# Altium PCB tscnew-tr-3-8(v1).PcbDoc
Units mm, origin at the board's own origin, x right, y up, seen from the top; angles counter-clockwise.
Board outline 151 x 86.38 mm, 2 copper layers (Top Layer, Bottom Layer); 75 components, 62 nets, 232 pads, 0 vias.
Unrouted connection lines stored in the file: 39.
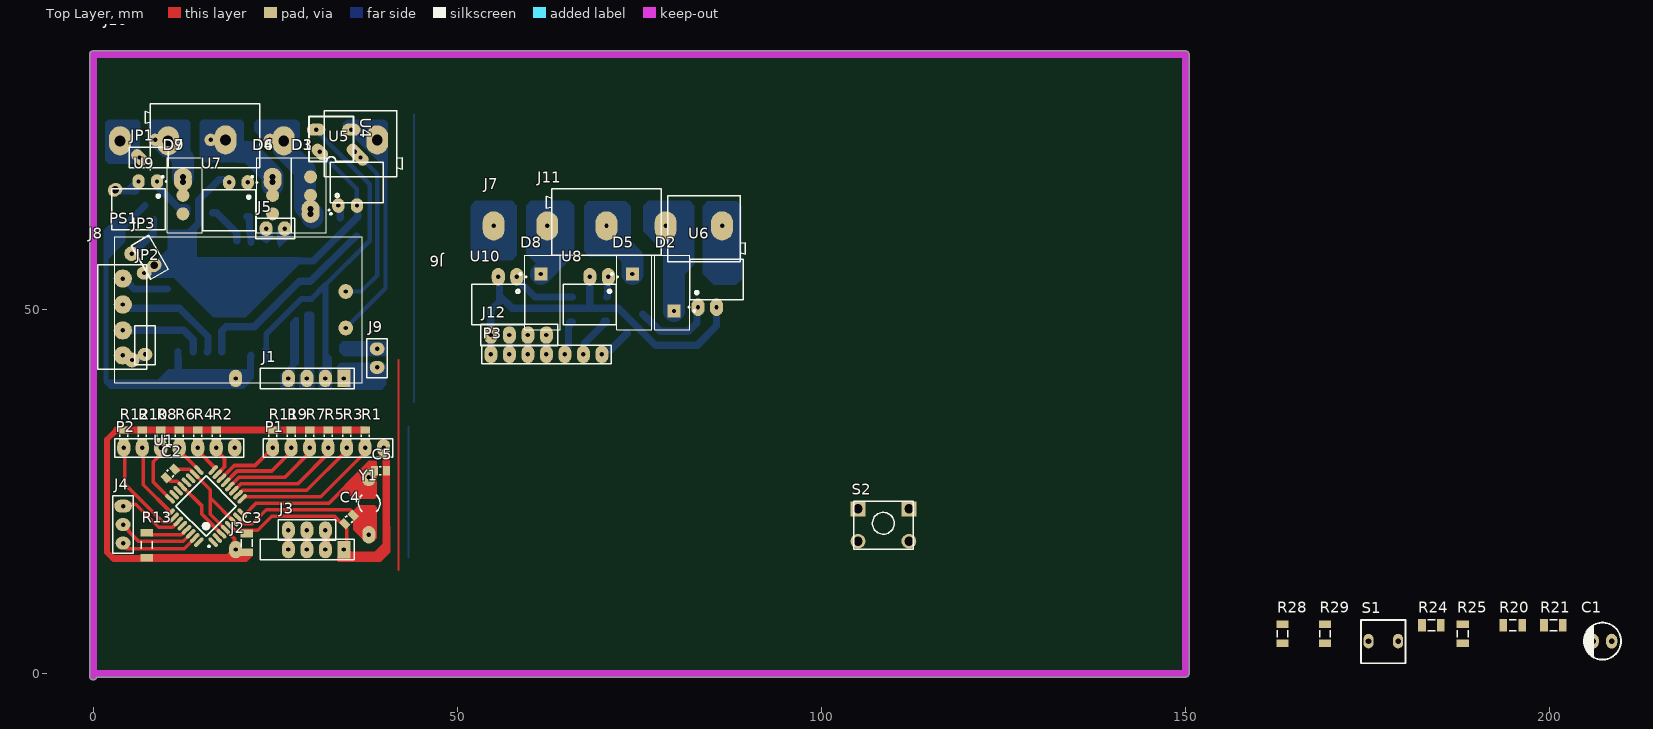
[diagram p0: Top Layer view]
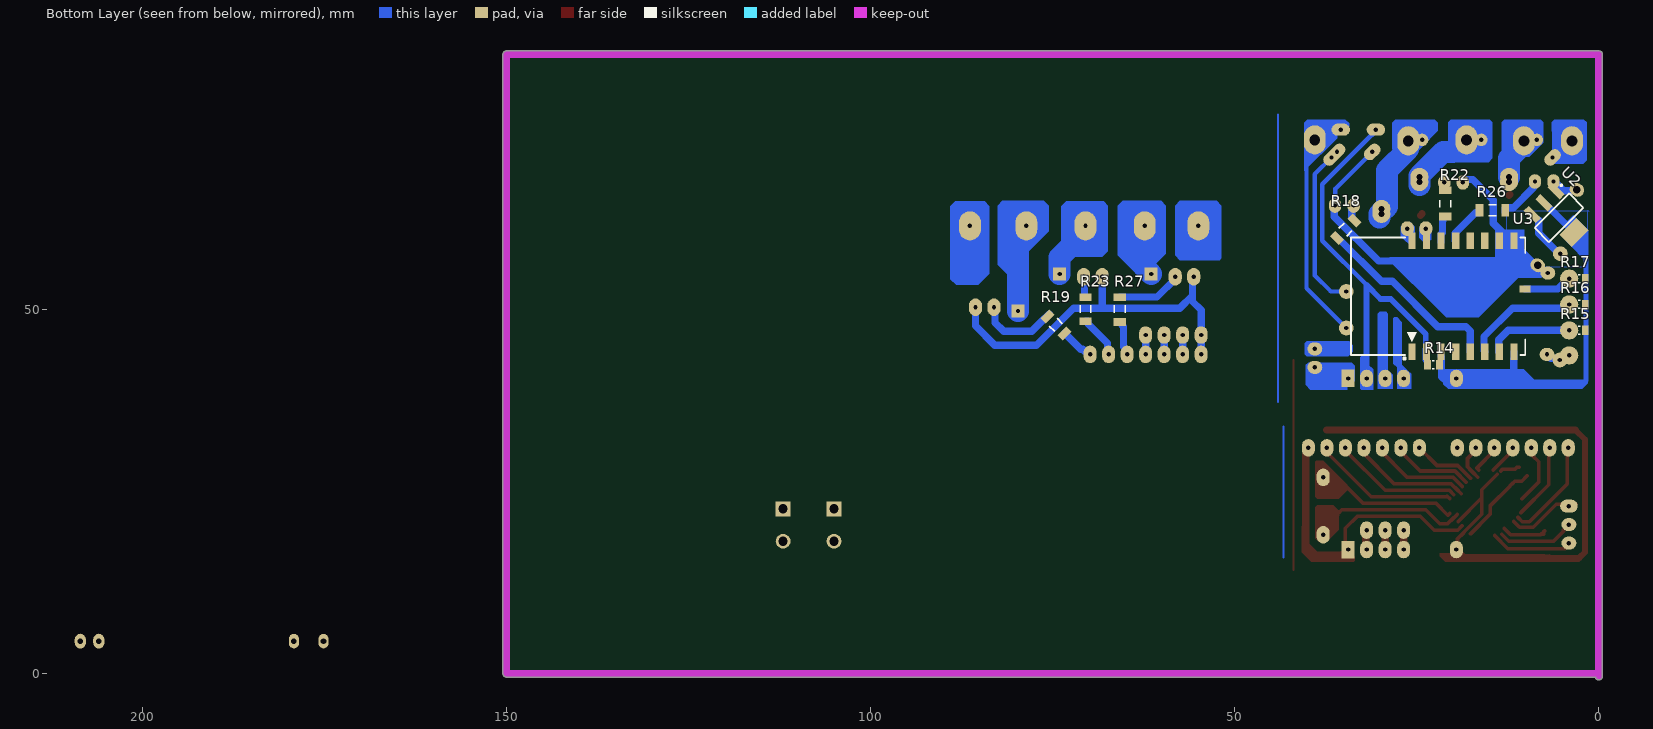
[diagram p1: Bottom Layer view, seen from below]

## Layer stack, top to bottom
Top Solder: solder mask 0.0102, Solder Resist, Dk 3.5
Top Layer: signal copper 0.0356
Dielectric 1: dielectric 0.32, FR-4, Dk 4.8
Bottom Layer: signal copper 0.0356
Bottom Solder: solder mask 0.0102, Solder Resist, Dk 3.5

## Board outline
-0.5,-0.381 -0.5,85 cw(c0,85) 0,85.5 150,85.5 cw(c150,85) 150.5,85 150.5,0 cw(c150,0) 150,-0.5 0.486,-0.5 cw(c0,-0.381)

## Design rules (kind name [scope] priority, off if disabled: settings)
Clearance Clearance_1 [InPolygon] p1: gap=0.8 ignorepadtopadclearanceinfootprint=FALSE
Clearance [All] p2: gap=0.254 ignorepadtopadclearanceinfootprint=FALSE except(0: Arc-Hole Track-Hole SMDPad-Hole THPad-Hole Via-Hole Fill-Hole Poly-Hole Region-Hole Text-Hole)
PolygonConnect [All] p1: connectstyle=Relief reliefconductorwidth=0.254 reliefentries=4 polygonreliefangle="90 Angle" airgapwidth=0.254
RoomDefinition tscnew-tr-3-8 [InComponentClass('tscnew-tr-3-8')] p1: confinementstyle=ConfineIn formatcopy=TRUE lockcomponents=FALSE outline 144.907,-4.953 247.904,-4.953 247.904,23.114 144.907,23.114
RoutingLayers [All] p1: top layer_v5=FALSE bottom layer_v5=TRUE
RoutingVias [All] p1: holewidth=0.711 width=2.5 viastyle="Through Hole" minholewidth=0.711 minwidth=1.27 maxholewidth=0.711 maxwidth=2
SolderMaskExpansion [All] p1: expansion=0.102 istentingtop=FALSE
Width [All] p1: maxlimit=3 minlimit=0.5 preferedwidth=1
29 further rules are at their usual default settings.

## Classes and differential pairs
component class tscnew-tr-3-8: D1 D3 D4 D6 D7 D9 D10 D13 D14 D20 D21 D22 D23 J1 J5 J6 J8 J9 J10 JP1 JP2 JP3 JP? P5 P7 PS1 R14 R15 R16 R17 R18 R22 R26 U2 U3 U4 U5 U7 U9 U17

## Components (designator, comment, footprint, x,y, rotation, side; value= is the part's Value field where it differs from the comment)
C1 "=Value" ELEC-CAP-RAD10-20 207.264,4.445 r0 top
C2 "=Value" "CAP 0805" 10.541,27.432 r225 top
C3 "=Value" "CAP 1206" 21.082,17.907 r90 top
C4 "=Value" "CAP 0805" 35.179,21.209 r45 top
C5 "=Value" "CAP 0805" 39.37,27.813 r180 top
D1 "BTA16-600CW3G" *TO254P1028X482X1968-3#1 29.845,63.119 r90 top
D2 "BTA16-600CW3G" *TO254P1028X482X1968-3#2 79.756,49.784 r90 top
D3 "BTA16-600CW3G" *TO254P1028X482X1968-3#3 29.845,63.119 r90 top
D4 "BTA16-600CW3G" *TO254P1028X482X1968-3#4 24.638,68.199 r270 top
D5 "BTA16-600CW3G" *TO254P1028X482X1968-3#2 74.041,54.864 r270 top
D6 "BTA16-600CW3G" *TO254P1028X482X1968-3#5 24.638,68.199 r270 top
D7 "BTA16-600CW3G" *TO254P1028X482X1968-3#1 12.319,68.199 r270 top
D8 "BTA16-600CW3G" *TO254P1028X482X1968-3#2 61.468,54.864 r270 top
D9 "BTA16-600CW3G" *TO254P1028X482X1968-3#6 12.333,68.213 r270 top
J1 "Header5X1" "HEADER 5X1" 34.417,40.513 r180 top
J2 "Header5X1" "HEADER 5X1" 34.417,17.018 r180 top
J3 "Header3X1" "HEADER 3X1"#1 31.877,19.685 r180 top
J4 "Header3X1" "HEADER 3X1"#2 4.099,22.987 r270 top
J5 "Header2X1" "Header 2X1"#1 25.019,61.087 r180 top
J6 "TBlock-2" "KF300-2 PIN"#1 39.243,73.279 r270 top
J7 "TBlock-2" "KF300-2 PIN"#2 86.36,61.595 r270 top
J8 "TBlock-4" "KF300-4 PIN" 4.064,41.275 r180 top
J9 "Header2X1" "Header 2X1"#1 38.989,43.307 r90 top
J10 "TBlock-3" "KF300-3 PIN"#1 10.287,73.152 r90 top
J11 "TBlock-3" "KF300-3 PIN"#2 65.405,61.468 r90 top
J12 "Header4X1" "HEADER 4X1" 54.61,46.482 r0 top
JP1 "Jumper" "Header 2X1"#2 7.62,70.866 r180 top
JP2 "Jumper" "Header 2X1"#3 7.112,45.085 r90 top
JP3 "Jumper" "Header 2X1"#4 7.747,57.15 r120 top
P1 "Header 7" HDR1X7 39.878,30.988 r180 top
P2 "Header 7" HDR1X7 19.431,30.988 r180 top
P3 "Header 7" HDR1X7 54.61,43.815 r0 top
PS1 "HLK-PM01" HLKPM01 34.671,47.451 r180 top
R1 "10K" "RES 0805 (2012X06L)" 37.338,32.639 r90 top
R2 "10K" "RES 0805 (2012X06L)" 16.891,32.639 r90 top
R3 "10K" "RES 0805 (2012X06L)" 34.798,32.639 r90 top
R4 "10K" "RES 0805 (2012X06L)" 14.351,32.639 r90 top
R5 "10K" "RES 0805 (2012X06L)" 32.258,32.639 r90 top
R6 "10K" "RES 0805 (2012X06L)" 11.811,32.639 r90 top
R7 "10K" "RES 0805 (2012X06L)" 29.718,32.639 r90 top
R8 "10K" "RES 0805 (2012X06L)" 9.271,32.639 r90 top
R9 "10K" "RES 0805 (2012X06L)" 27.178,32.639 r90 top
R10 "10K" "RES 0805 (2012X06L)" 6.731,32.639 r90 top
R11 "10K" "RES 0805 (2012X06L)" 24.638,32.639 r90 top
R12 "10K" "RES 0805 (2012X06L)" 4.191,32.639 r90 top
R13 "10K" "RES 1206 (3216X08L)"#1 7.366,17.653 r270 top
R14 "10K" "RES 0805 (2012X06L)" 22.733,42.418 r0 bottom
R15 "10K" "RES 0805 (2012X06L)" 2.667,47.117 r180 bottom
R16 "10K" "RES 0805 (2012X06L)" 2.667,50.673 r180 bottom
R17 "10K" "RES 0805 (2012X06L)" 2.667,54.229 r180 bottom
R18 "10K" "RES 1206 (3216X08L)"#2 34.798,60.96 r135 bottom
R19 "10K" "RES 1206 (3216X08L)"#3 74.549,47.879 r45 bottom
R20 "10K" "RES 1206 (3216X08L)"#4 194.945,6.604 r0 top
R21 "10K" "RES 1206 (3216X08L)"#4 200.533,6.604 r0 top
R22 "10K" "RES 1206 (3216X08L)"#5 21.082,64.516 r90 bottom
R23 "10K" "RES 1206 (3216X08L)"#3 70.485,50.038 r90 bottom
R24 "10K" "RES 1206 (3216X08L)"#4 183.769,6.604 r0 top
R25 "10K" "RES 1206 (3216X08L)"#4 188.087,5.461 r90 top
R26 "10K" "RES 1206 (3216X08L)"#6 14.605,63.627 r180 bottom
R27 "10K" "RES 1206 (3216X08L)"#7 65.786,50.038 r90 bottom
R28 "10K" "RES 1206 (3216X08L)"#4 163.322,5.461 r90 top
R29 "10K" "RES 1206 (3216X08L)"#4 169.164,5.461 r90 top
S1 "PB-2pin" PB-2pin 174.117,1.397 r0 top
S2 "PUSH BUTTON DOUBLE" "PUSH BUTTON" 108.521,20.383 r0 top
U1 "ATmega8-16AC" 32A_N 15.494,22.987 r135 top
U2 "LM1117MP-3.3" MP04A_N 5.461,62.611 r225 bottom
U3 "ESP_12_E" ESP_12_E 25.654,43.811 r90 bottom
U4 "PC817" DIP4 36.491,72.289 r180 top
U5 "K3021P" DIP762W50P254L730H410Q6#1 36.195,67.437 r90 top
U6 "K3021P" DIP762W50P254L730H410Q6#2 85.598,54.102 r90 top
U7 "K3021P" DIP762W50P254L730H410Q6#3 18.669,63.627 r270 top
U8 "K3021P" DIP762W50P254L730H410Q6#2 68.199,50.673 r270 top
U9 "K3021P" DIP762W50P254L730H410Q6#3 6.223,63.754 r270 top
U10 "K3021P" DIP762W50P254L730H410Q6#2 55.626,50.673 r270 top
Y1 "XTAL" R38 37.846,23.368 r0 top

## Footprints (in the part's own frame and the unit in brackets; to place one, negate y for a bottom-side part, rotate by r counter-clockwise, add the part's x,y. Pads: shape width x height; smd on the part's side, far side on the other; paste and mask are expansions set on the pad)
32A_N [mm] "Thin QFP, 32-Leads, Body 7x7mm, Pitch 0.8mm, IPC Medium Density"
  oval 1.65x0.55 smd: 1(-4.2,2.8) 2(-4.2,2) 3(-4.2,1.2) 4(-4.2,0.4) 5(-4.2,-0.4) 6(-4.2,-1.2) 7(-4.2,-2) 8(-4.2,-2.8) 17(4.2,-2.8) 18(4.2,-2) 19(4.2,-1.2) 20(4.2,-0.4) 21(4.2,0.4) 22(4.2,1.2) 23(4.2,2) 24(4.2,2.8)
  oval 0.55x1.65 smd: 9(-2.8,-4.2) 10(-2,-4.2) 11(-1.2,-4.2) 12(-0.4,-4.2) 13(0.4,-4.2) 14(1.2,-4.2) 15(2,-4.2) 16(2.8,-4.2) 25(2.8,4.2) 26(2,4.2) 27(1.2,4.2) 28(0.4,4.2) 29(-0.4,4.2) 30(-1.2,4.2) 31(-2,4.2) 32(-2.8,4.2)
  silkscreen extent -4.32,-2.95 2.95,3.75, body extent -3.5,-3.5 3.5,3.5, height 1.2
*TO254P1028X482X1968-3#1 [mm]
  round 2.5 hole 0.8: 1(0,0)
  round 1.79 smd: 2(2.54,0) 3(5.08,0)
  silkscreen extent -2.6,-2.9 7.68,2.64
*TO254P1028X482X1968-3#2 [mm]
  rect 1.79x1.79 hole 0.6: 1(0,0)
  silkscreen extent -2.6,-2.9 7.68,2.64
*TO254P1028X482X1968-3#3 [mm]
  round 2.5 hole 0.8: 1(0.681,0)
  silkscreen extent -2.6,-2.9 7.68,2.64
*TO254P1028X482X1968-3#4 [mm]
  round 2.5 hole 0.8: 1(0.699,0)
  round 1.79 smd: 2(2.54,0) 3(5.08,0)
  silkscreen extent -2.6,-2.9 7.68,2.64
*TO254P1028X482X1968-3#5 [mm]
  round 2.5 hole 0.8: 1(0,0)
  silkscreen extent -2.6,-2.9 7.68,2.64
*TO254P1028X482X1968-3#6 [mm]
  round 2.5 hole 0.8: 1(0.713,0)
  silkscreen extent -2.6,-2.9 7.68,2.64
"CAP 0805" [mm]
  rect 0.95x1.3 smd: 1(-0.889,0) 2(0.761,0)
  silkscreen extent -0.21,-0.55 0.09,0.55, body extent -1.08,-0.63 0.95,0.63, height 0.65
"CAP 1206" [mm]
  rect 1.05x1.7 smd: 1(-1.27,0) 2(1.326,0)
  silkscreen extent -0.47,-0.75 0.53,0.75, body extent -1.49,-0.77 1.55,0.75, height 0.75
DIP4 [mm]
  oval 2.54x1.651 hole 0.6 rot 135: 1(0.55,0.661) 3(5.376,0.661)
  oval 2.54x1.651 hole 0.6: 2(1.058,-2.387) 4(5.884,-2.387)
  silkscreen extent 0.76,-4.19 6.86,1.96, body extent -0.13,-3.56 7.75,1.03, height 4.3
DIP762W50P254L730H410Q6#1 [mm]
  oval 2x1.7 hole 0.6: 1(-3.175,2.54) 2(-3.175,-0.024)
  silkscreen extent -3.9,-3.65 2.8,3.9
DIP762W50P254L730H410Q6#2 [mm]
  oval 2.4x1.8 hole 0.6: 1(-3.81,2.54) 2(-3.81,0)
  silkscreen extent -3.9,-3.65 2.8,3.9
DIP762W50P254L730H410Q6#3 [mm]
  oval 2x1.7 hole 0.6: 1(-3.81,2.54) 2(-3.81,0)
  silkscreen extent -3.9,-3.65 2.8,3.9
ELEC-CAP-RAD10-20 [mil]
  oval 60x80 hole 30: 1(-50,0) 2(50,0)
  silkscreen extent -100,-100 100,100, body extent -124,-124 124,124, height 404
ESP_12_E [mm] "ESP-12 Wi-Fi Module by AI-Thinker"
  rect 2.25x1 smd: 1(0.375,0) 2(0.375,-2) 3(0.375,-4) 4(0.375,-6) 5(0.375,-8) 6(0.375,-10) 7(0.375,-12) 8(0.375,-14) 15(15.625,-14) 16(15.625,-12) 17(15.625,-10) 18(15.625,-8) 19(15.625,-6) 20(15.625,-4) 21(15.625,-2) 22(15.625,0)
  rect 1x1.5 smd: 12(9,-15.5)
  silkscreen extent -0.7,-15.57 16.08,8.37, body extent 0,-15.49 16,8.51, height 2.75
HDR1X7 [mm] "Connector; Header; 7 Position"
  oval 1.8x2.4 hole 0.6: 1(0,0) 2(2.54,0) 3(5.08,0) 4(7.62,0) 5(10.16,0) 6(12.7,0) 7(15.24,0)
  silkscreen extent -1.27,-1.27 16.51,1.27
"Header 2X1"#1 [mil]
  oval 70x80 hole 23.62: 1(-50,0) 2(50,0)
  silkscreen extent -105,-55 105,55, body extent -100,-50 100,50, height 374
"Header 2X1"#2 [mil]
  oval 100x65 hole 23.62 rot 135: 1(-1145,0) 2(50,0)
  silkscreen extent -105,-55 105,55, body extent -100,-50 100,50, height 374
"Header 2X1"#3 [mil]
  oval 70x80 hole 23.62: 1(-50,0) 2(390,5)
  silkscreen extent -105,-55 105,55, body extent -100,-50 100,50, height 374
"Header 2X1"#4 [mil]
  oval 70x80 hole 40: 1(-50,0) 2(409.54,-20.65)
  silkscreen extent -105,-55 105,55, body extent -100,-50 100,50, height 374
"HEADER 3X1"#1 [mm]
  oval 1.8x2.4 hole 0.6: 1(0,0) 2(2.54,0) 3(5.08,0)
  silkscreen extent -1.4,-1.4 6.48,1.4, body extent -1.24,-1.27 6.38,1.27, height 8.38
"HEADER 3X1"#2 [mm]
  oval 1.8x2.4 hole 0.6: 1(0,0)
  oval 1.778x2.032 hole 0.6: 2(2.54,0) 3(5.08,0)
  silkscreen extent -1.4,-1.4 6.48,1.4, body extent -1.24,-1.27 6.38,1.27, height 8.38
"HEADER 4X1" [mm]
  oval 1.8x2.4 hole 0.6: 1(0,0) 2(2.54,0) 3(5.08,0) 4(7.62,0)
  silkscreen extent -1.43,-1.5 9.18,1.5, body extent -1.19,-1.22 8.97,1.32, height 8.38
"HEADER 5X1" [mm]
  rect 1.8x2.4 hole 0.6: 1(0,0)
  oval 1.8x2.4 hole 0.6: 2(2.54,0) 3(5.08,0) 4(7.62,0) 5(14.859,0)
  silkscreen extent -1.4,-1.4 11.46,1.4, body extent -1.22,-1.19 11.48,1.35, height 8.38
HLKPM01 [mil]
  round 80 hole 23.62: 1(0,0) 2(0,-196.85) 3(1155,173.15) 4(1157.48,-401.57)
  silkscreen extent -138,-492 1248,295
"KF300-2 PIN"#1 [mm]
  oval 4x3 hole 1.5: 1(0,-0.243) 2(0.127,-35.56)
  silkscreen extent -4.06,-7.49 5.08,3.18, body extent -3.99,-7.5 5.08,3.24, height 12.52
"KF300-2 PIN"#2 [mm]
  oval 4x3 hole 0.6: 1(0.127,0) 2(0.127,-31.369)
  silkscreen extent -4.06,-7.49 5.08,3.18, body extent -3.99,-7.5 5.08,3.24, height 12.52
"KF300-3 PIN"#1 [mm]
  oval 4x3 hole 1.5: 1(0,0) 2(0.127,-7.874) 3(0,-15.875)
  silkscreen extent -4.06,-12.57 5.08,3.18, body extent -4,-12.57 5.07,3.25, height 12.78
"KF300-3 PIN"#2 [mm]
  oval 4x3 hole 0.6: 1(0,3.048) 2(0,-5.08) 3(0,-13.208)
  silkscreen extent -4.06,-12.57 5.08,3.18, body extent -4,-12.57 5.07,3.25, height 12.78
"KF300-4 PIN" [mm]
  round 2.5 hole 0.6: 1(0,-2.413) 2(0,-5.842) 3(0,-9.398) 4(0,-12.954)
  silkscreen extent -3.3,-14.86 3.43,-0.51, body extent -4.04,-17.65 5.03,3.25, height 12.52
MP04A_N [mm] "SOT223, 4-Leads, Body 6.5x3.5mm, Pitch 2.3mm, Lead Span 7mm, IPC Medium Density"
  rect 2.4x1 smd: 1(-2.9,2.3) 2(-2.9,0) 3(-2.9,-2.3)
  rect 2.4x3.3 smd: 4(2.9,0)
  silkscreen extent -3.02,-3.35 1.4,3.47, body extent -1.85,-3.35 1.85,3.35, height 1.8
PB-2pin [mil] "Switch"
  oval 55.12x78.74 hole 30: 1(40,120) 2(200,120)
  silkscreen extent 0,0 240,235
"PUSH BUTTON" [mil]
  rect 80x80 hole 50: 1(-137.5,87.5) 2(137.5,87.5)
  round 80 hole 50: 3(-137.5,-87.5) 4(137.5,-87.5)
  silkscreen extent -160,-130 160,130, body extent -155,-121 157,123, height 205
R38 [mm] "Crystal, Thru-Hole; 2 Leads; Body 3.1 x 8.2 mm (Dia.xH)"
  oval 1.8x2.4 hole 0.6: 1(0,3.556) 2(0,-4.318)
  silkscreen extent -1.43,-1.18 1.55,1.2
"RES 0805 (2012X06L)" [mm] "Chip Resistor, 2-Leads, Body 2.0x1.3mm, IPC High Density _ (0.100 W)"
  rect 0.95x1.3 smd: 1(-0.838,0) 2(0.812,0)
  silkscreen extent -0.16,-0.55 0.14,0.55, body extent -1.03,-0.63 1,0.64, height 0.6
"RES 1206 (3216X08L)"#1 [mm] "Chip Resistor, 2-Leads, Body 3.2x1.6mm, IPC High Density _ (0.125 W)"
  rect 1.05x1.7 smd: 1(-1.651,0) 2(1.778,0)
  silkscreen extent -0.5,-0.75 0.5,0.75, body extent -1.52,-0.76 1.53,0.76, height 0.6
"RES 1206 (3216X08L)"#2 [mm] "Chip Resistor, 2-Leads, Body 3.2x1.6mm, IPC High Density _ (0.125 W)"
  rect 1.05x1.7 smd: 1(-1.616,0) 2(1.796,0)
  silkscreen extent -0.5,-0.75 0.5,0.75, body extent -1.52,-0.76 1.53,0.76, height 0.6
"RES 1206 (3216X08L)"#3 [mm] "Chip Resistor, 2-Leads, Body 3.2x1.6mm, IPC High Density _ (0.125 W)"
  rect 1.05x1.7 smd: 1(-1.651,0) 2(1.651,0)
  silkscreen extent -0.5,-0.75 0.5,0.75, body extent -1.52,-0.76 1.53,0.76, height 0.6
"RES 1206 (3216X08L)"#4 [mm] "Chip Resistor, 2-Leads, Body 3.2x1.6mm, IPC High Density _ (0.125 W)"
  rect 1.05x1.7 smd: 1(-1.295,0) 2(1.301,0)
  silkscreen extent -0.5,-0.75 0.5,0.75, body extent -1.52,-0.76 1.53,0.76, height 0.6
"RES 1206 (3216X08L)"#5 [mm] "Chip Resistor, 2-Leads, Body 3.2x1.6mm, IPC High Density _ (0.125 W)"
  rect 1.05x1.7 smd: 1(-1.749,0) 2(1.851,0)
  silkscreen extent -0.5,-0.75 0.5,0.75, body extent -1.52,-0.76 1.53,0.76, height 0.6
"RES 1206 (3216X08L)"#6 [mm] "Chip Resistor, 2-Leads, Body 3.2x1.6mm, IPC High Density _ (0.125 W)"
  rect 1.05x1.7 smd: 1(-1.778,0) 2(1.778,0)
  silkscreen extent -0.5,-0.75 0.5,0.75, body extent -1.52,-0.76 1.53,0.76, height 0.6
"RES 1206 (3216X08L)"#7 [mm] "Chip Resistor, 2-Leads, Body 3.2x1.6mm, IPC High Density _ (0.125 W)"
  rect 1.05x1.7 smd: 1(-1.778,0) 2(1.651,0)
  silkscreen extent -0.5,-0.75 0.5,0.75, body extent -1.52,-0.76 1.53,0.76, height 0.6

## Part data
C1: library part "Capacitor Electrolytic", "Electrolytic Capacitor"
C2 C3 C4 C5: library part Capacitor, "Capacitor"
D1 D2 D3 D4 D5 D6 D7 D8 D9: "TRIAC Standard 600V 16A Through Hole TO-220AB", Package="TO-220 ON Semiconductor", Arrow_Americas-Purchase-URL=https://snapeda.com/shop?store=Arrow+Americas&id=390940, Availability=Unavailable, DigiKey-Purchase-URL=https://snapeda.com/shop?store=DigiKey&id=390940, MF="Littelfuse Inc.", Mouser-Purchase-URL=https://snapeda.com/shop?store=Mouser&id=390940, MP=BTA16-600CW3G, Price=None, SnapEDA_Link=https://www.snapeda.com/parts/BTA16-600CW3G/Littelfuse%20Inc./view-part/390940/?ref=snap
P1 P2 P3: "Header, 7-Pin", LatestRevisionDate=17-Jul-2002, LatestRevisionNote="Re-released for DXP Platform.", Publisher="Altium Limited"
PS1: "<b>Ultra-compact power module</b><p> Source: <a href=\"https://datasheet.lcsc.com/szlcsc/1906201102_HI-LINK-HLK-PM03_C209904.pdf\"> Datasheet </a>", Package="Package Analog Devices", Availability=Unavailable, MF=Hi-link, MP=hlk-pm01, Price=None, SnapEDA_Link=https://www.snapeda.com/parts/hlk-pm01/Hi-link/view-part/2875605/?ref=snap
R1 R2 R3 R4 R5 R6 R7 R8 R9 R10 R11 R12 R13 R14 R15 R16 R17 R18 R19 R20 R21 R22 R23 R24 R25 R26 R27 R28 R29: library part Resistor, "Resistor", Power="1/4 W", Tolerance=5%
S1 S2: "Switch"
  S1: Designer="Seyed Mohsen Ghasemian", E-mail=picpars@gmail.com, Publisher=www.picpars.com, WEB=www.picpars.com
U1: "8-Bit AVR Microcontroller with 8K Bytes of In-System Programmable Flash Memory", Supplier Part Number 1=ATMEGA8-16AC-ND, Code_JEDEC=MS-026-ABA, ComponentLink1Description=Datasheet, ComponentLink1URL=http://www.atmel.com/dyn/resources/prod_documents/doc2486.pdf, ComponentLink2Description="Atmel.com Home", ComponentLink2URL=http://www.atmel.com, DatasheetVersion=2486H-AVR-09/02, LatestRevisionDate=16-Oct-2006, LatestRevisionNote="IPC-7351 Footprint Added.", PackageDescription="32-Lead, 7x7x1.0 mm Body, 0.8mm Lead Pitch, Thin Profile Plastic Quad Flat Package (TQFP)", PackageReference=32A, PackageVersion="revB, Oct-2001", Published=17-Sep-2003, Publisher="Altium Limited", Supplier 1=Digi-Key, Supplier 2=Mouser, Supplier Part Number 2=556-ATMEGA8-16AC
U2: "800mA Low-Dropout Linear Regulator", DigiKeyPartNumber=LM1117MP-3.3CT-ND, Manufacturer="National Semiconductor", PackageTopMarking=XYTT*N05A, PowerWise=N, Code_IPC=SOT223-4, Code_JEDEC=TO-261-AA, ComponentLink1Description="LM1117 Datasheet", ComponentLink1URL=http://www.national.com/ds/LM/LM1117.pdf, ComponentLink2Description="LM1117 Web Page", ComponentLink2URL=http://www.national.com/pf/LM/LM1117.html, ComponentLink3Description="MP04A Package Page", ComponentLink3URL=http://www.national.com/packaging/folders/mp04a.html, CompType="LDO IC", DatasheetVersion=Apr-2006, PackageDescription="Molded SOT-223, 6.50 x 3.56 x 1.6mm Body, 4 Lead, 2.3mm Pitch", PackageReference=MP04A, PackageVersion="revB, Apr-2003", PartNumber=LM1117MP-3.3, PinCount=4, Published=4-Dec-2008, Publisher="Altium Limited", RoHS=O
U3: "ESP-12 Wi-Fi Module by AI-Thinker", IC=ESP8266-EX, Vendor=Ai-thinker
U4: library part OPTCOUPLER_01, "4-Pin Phototransistor Optocoupler"
U5 U6 U7 U8 U9 U10: "Optoisolator Triac Output 5300Vrms 1 Channel 6-DIP", Package="DIP-6 Vishay", Availability=Unavailable, DigiKey-Purchase-URL=https://snapeda.com/shop?store=DigiKey&id=291595, MF="Vishay Semiconductor", Mouser-Purchase-URL=https://snapeda.com/shop?store=Mouser&id=291595, MP=K3021P, Price=None, SnapEDA_Link=https://www.snapeda.com/parts/K3021P/Vishay%20Semiconductor%20Opto%20Division/view-part/291595/?ref=snap
Y1: "Crystal Oscillator", LatestRevisionDate=17-Jul-2002, LatestRevisionNote="Re-released for DXP Platform.", PackageDescription="Crystal, Thru-Hole; 2 Leads; Body 3.1 x 8.2 mm (Dia.xH)", PackageReference=R38, Published=8-Jun-2000, Publisher="Altium Limited"

## Free pads (board coordinates)
  round 1.7 hole 0.6: 2(8.509,73.279) 3(16.129,73.279) 4(24.257,73.279)

## Nets (pads, with @x,y where several pads share a name; then routed paths per layer and width w, separated by ;. In a path a pad name is that pad's centre, name@x,y a point inside that pad or via, vN(x,y) a via of type N, cw(c..) or ccw(c..) an arc to the next point about the centre after c; other vN are vias at no path point)
adc: J1.2 J2.2 J3.1 J4.1 R14.2 U1.27 U3.2 U4.4 | length 69.9
  Top Layer w0.5: J4.1@3.088,23.236 J4.1@4.956,23.236 ; J4.1@3.464,23.241 J4.1@3.469,23.236 ; J4.1@3.683,23.236 5.175,23.236 5.18,23.241 5.842,23.241 9.008,20.075 10.872,20.075 11.662,20.866 U1.27
  Top Layer w1: J2.2 31.988,17.129 31.988,19.574 J3.1
  Bottom Layer w0.6: U4.4@31.115,74.041 37.973,67.183 37.973,59.436 31.877,53.34
  Bottom Layer w0.8: U3.2@23.717,44.545 23.754,44.582 23.754,46.614 28.575,51.435 29.972,51.435 31.877,53.34 J1.2 ; U4.4 31.115,74.168 U4.4@31.115,74.041 ; J1.2@31.496,40.513 31.496,39.878 J1.2@32.258,39.878
  Bottom Layer w1: R14.2@23.717,43.043 U3.2@23.717,44.545
btn: S2.2 U3.18
faz: D1.2 D4.2 D7.2 J6.2 JP1.1 JP1.2 PS1.2 R20.2 R21.2 R24.2 R25.2 R28.2 R29.2 U4.1 | length 23.6
  Top Layer w1: D7.2@12.192,65.786 D7.2
  Bottom Layer w0.6: PS1.2 36.783,52.451 38.989,54.657 38.989,68.58 JP1.1 U4.1
GND: C1.2 C2.2 C3.2 C4.1 C5.1 J1.1 J2.1 J8.1 J9.1 J12.1 JP2.1 JP2.2 JP3.1 JP3.2 P1.1 P2.1 P3.1 PS1.3 S1.1 S2.4 U1.3 U1.5 U1.21 U2.1 U3.15 U3.16 U4.3 U5.2 U6.2 U7.2 U8.2 U9.2 U10.2 | length 162
  Top Layer w0.5: C2.2@9.851,27.148 10.583,26.416 11.529,26.416 11.843,26.102 11.843,26.086 11.859,26.086 U1.21@12.139,25.806 ; U1.21 14.925,22.99 14.925,21.859 U1.3 ; U1.5@18.775,20.285 19.375,19.685 22.606,19.685 24.527,21.606 33.131,21.606 34.798,19.939 34.798,17.399 J2.1
  Top Layer w1: J2.1 34.417,16.718 34.817,16.318 35.341,16.318 35.403,16.256 38.862,16.256 40.259,17.653 C5.1 40.259,30.091 39.878,30.472 P1.1
  Bottom Layer w0.6: U4.3 36.195,66.548 U5.2@36.195,65.192
  Bottom Layer w1: JP3.2@3.048,66.288 U2.1@5.631,66.288 ; JP3.2@3.296,66.633 2.879,66.633 JP3.2@3.302,66.421 ; J8.1@4.064,43.434 4.191,43.307 5.334,43.307 5.842,43.307 PS1.3@5.899,43.25 ; 5.126,66.633 U9.2@5.631,67.139 ; PS1.3 5.531,43.25 PS1.3@5.899,43.25 ; U2.1@5.631,66.21 U2.1@5.631,66.288 ; U2.1 U2.1@5.631,66.288 ; U9.2@6.096,67.564 6.057,67.564 U9.2@5.631,67.139 ; JP2.1@7.493,43.815 7.155,43.815 6.591,43.25 PS1.3@5.899,43.25 ; 8.001,54.836 11.26,54.836 13.398,56.974 13.398,57.668 ; U3.15 11.654,60.061 12.69,60.061 14.478,61.849 14.478,65.024 17.297,67.843 U7.2@18.313,67.843 ; 11.717,58.293 U3.15@11.717,59.436 ; 13.43,58.293 U3.16@13.43,59.035 ; 23.167,56.642 30.226,56.642 36.322,62.738 U5.2@36.322,64.238 ; P3.1 J12.1 54.61,49.911 55.779,51.08 55.779,51.917 ; U10.2 55.779,54.33 55.779,51.917 ; U8.2 68.199,50.165 ; U6.2 85.598,47.752 82.931,45.085 77.216,45.085 72.136,50.165 68.199,50.165 ; U2.1@5.631,66.288 U9.2@5.631,67.139 ; 55.779,51.917 57.531,50.165 68.199,50.165
i13: U1.2
i14: U1.1
i15: U1.32
i16: U1.28
NetC4_2: C4.2 U1.7 Y1.2 | length 21.3
  Top Layer w0.5: U1.7@19.434,21.845 19.451,21.845 20.214,21.082 20.257,21.082 20.257,21.066 20.305,21.017 20.322,21.017 20.765,20.574 21.844,20.574 23.749,22.479 35.306,22.479 C4.2@35.687,22.098 ; C4.2@35.844,21.747 37.377,20.214 37.377,20.171 37.846,19.702 Y1.2
NetC5_2: C5.2 U1.8 Y1.1 | length 20.1
  Top Layer w0.5: U1.8 20.696,21.745 20.729,21.745 22.352,23.368 32.385,23.368 36.489,27.472 37.298,27.472 Y1.1
NetD1_3: D1.3
NetD2_3: 
NetD4_3: D4.3
NetD5_3: 
NetD7_3: D7.3
NetD8_3: 
NetR18_2: R18.2 U5.1 | length 1.7
  Bottom Layer w1: U5.1@33.782,64.262 33.916,64.128 R18.2@33.916,62.604
NetR19_2: R19.2 U6.1 | length 11.1
  Bottom Layer w1: R19.2@75.464,49.334 76.097,48.701 76.14,48.701 77.851,46.99 81.71,46.99 82.905,48.185 82.905,50.139 U6.1
NetR20_1: R20.1
NetR21_1: R21.1
NetR22_2: R22.2 U7.1
NetR23_2: R23.2 U8.1 | length 3
  Bottom Layer w1: R23.2 70.587,51.689 70.612,51.714 70.612,54.356 U8.1
NetR24_1: R24.1
NetR25_1: R25.1
NetR26_2: R26.2 U9.1 | length 6.6
  Bottom Layer w1: U9.1@8.636,67.564 8.636,67.225 8.986,66.875 8.986,66.706 11.715,63.977 12.802,63.977 12.852,63.927 R26.2@12.852,63.342
NetR27_2: R27.2 U10.1 | length 9
  Bottom Layer w1: U10.1 58.166,54.183 60.66,51.689 R27.2
NetR28_1: R28.1
NetR29_1: R29.1
nol: J6.1 J7.1 PS1.1 U4.2 | length 67
  Bottom Layer w0.254: 44.069,37.259 44.069,76.759
  Bottom Layer w0.6: PS1.1 40.132,52.912 40.132,71.36 39.751,71.741 J6.1@39.751,72.517
o1: P1.2 R1.1 U1.9 | length 19.4
  Top Layer w0.5: U1.9 20.823,24.356 20.856,24.356 20.955,24.257 31.242,24.257 P1.2@37.211,30.226
o1esp: R26.1 U3.19 | length 5.5
  Bottom Layer w1: R26.1@16.408,63.277 16.86,63.277 16.923,63.277 19.717,60.483 U3.19@19.717,59.436
o2: P1.3 R3.1 U1.10 | length 17.8
  Top Layer w0.5: U1.10@19.906,24.557 20.495,25.146 29.337,25.146 34.798,30.607 P1.3
o2esp: R22.1 U3.20 | length 4
  Bottom Layer w1: R22.1 21.407,62.767 21.432,62.742 21.432,62.187 21.463,62.156 21.463,60.545 21.654,60.354 U3.20@21.654,59.211
o3: P1.4 R5.1 U1.11 | length 16
  Top Layer w0.5: U1.11@18.869,24.694 18.885,24.694 19.298,25.107 19.298,25.123 19.341,25.123 20.253,26.035 28.067,26.035 P1.4@32.512,30.48
o3esp: R18.1 U3.5 | length 26.8
  Bottom Layer w1: U3.5 17.654,47.039 18.24,47.625 22.098,47.625 28.321,53.848 29.845,53.848 35.596,59.599 35.687,59.599 36.16,60.071 R18.1@36.195,60.071
o4: P1.5 R7.1 U1.12 | length 13.3
  Top Layer w0.5: U1.12 19.997,26.924 26.289,26.924 P1.5@29.972,30.607
o5: P1.6 R9.1 U1.13 | length 11.1
  Top Layer w0.5: U1.13 19.754,27.813 24.511,27.813 P1.6@27.432,30.734
o6: P1.7 R11.1 U1.14 | length 8.8
  Top Layer w0.5: U1.14 19.377,28.567 22.217,28.567 P1.7
o7: P2.2 R2.1 U1.15 | length 5.1
  Top Layer w0.5: U1.15@16.606,26.957 16.622,26.957 17.035,27.37 17.035,27.386 17.051,27.386 17.464,27.799 17.464,27.815 18.034,28.385 18.034,29.519 16.891,30.662 P2.2
o8: P2.3 R4.1 U1.16 | length 4.1
  Top Layer w0.5: P2.3 14.351,30.607 16.736,28.222 16.736,28.189 U1.16
o9: P2.4 R6.1 U1.17 | length 4.2
  Top Layer w0.5: P2.4 11.811,30.616 U1.17@14.491,27.937
o10: P2.5 R8.1 U1.24 | length 8.4
  Top Layer w0.5: P2.5 9.022,30.739 9.022,29.85 8.255,29.083 8.255,26.289 10.13,24.414 10.13,24.404 10.544,23.99 U1.24
o11: P2.6 R10.1 U1.25 | length 10.5
  Top Layer w0.5: P2.6 6.858,30.861 6.858,25.908 U1.25@10.671,22.095
o12: P2.7 R12.1 U1.26 | length 14.2
  Top Layer w0.5: P2.7 4.318,30.861 4.318,26.035 9.524,20.829 10.494,20.829 11.096,21.431 U1.26
oo1: D7.1 D8.1 D9.1 J10.1 J11.1 pad.2 | length 14.9
  Bottom Layer w3: J10.1@10.033,74.168 10.033,73.025 12.346,70.712 12.346,68.226 D7.1 ; D8.1 62.611,56.007 62.611,61.476 62.357,61.73 J11.1@62.357,62.23
oo2: D4.1 D5.1 D6.1 J10.2 J11.2 pad.3 | length 18.9
  Bottom Layer w3: J10.2@18.161,73.385 18.161,72.779 18.894,72.779 20.045,71.628 21.336,71.628 D6.1@24.638,68.326 ; D6.1@24.638,67.056 D6.1 ; J11.2@70.485,62.23 70.485,60.706 74.041,57.15 D5.1
oo3: D1.1 D2.1 D3.1 J10.3 J11.3 pad.4 | length 27.5
  Top Layer w1: 24.273,63.119 24.487,62.905
  Bottom Layer w3: 24.257,74.422 J10.3@25.836,72.843 ; J10.3 26.162,72.009 29.083,69.088 29.083,64.135 D3.1@29.972,63.246 ; D3.1@30.099,62.611 D3.1@30.099,63.119 ; J11.3@78.486,61.976 79.121,61.976 79.756,60.833 D2.1
q1: U1.22
rst: R13.1 S1.2 U1.29 U3.1 | length 6.4
  Top Layer w0.5: R13.1@7.437,19.558 R13.1@7.839,19.156 ; R13.1@7.585,19.156 7.899,19.156 8.005,19.05 12.109,19.05 U1.29@12.973,19.914
"rx at": J1.3 J2.3 J3.2 J4.2 J5.1 U1.30 U3.22 | length 13.6
  Top Layer w0.5: J4.2@3.337,20.574 J4.2@3.464,20.574 ; J4.2@3.718,20.447 J4.2@3.88,20.447 ; J4.2 4.85,19.696 4.85,19.534 6.223,18.161 12.352,18.161 U1.30@13.317,19.126
  Top Layer w1: J2.3 J3.2
s1: J8.4 R17.1 U3.12 | length 6.6
  Bottom Layer w1: J8.4@4.064,53.975 4.47,53.975 5.634,52.811 U3.12
s2: J8.3 R16.1 U3.6 | length 15.5
  Bottom Layer w1: J8.3@3.959,50.165 11.857,50.165 15.748,46.274 15.748,44.28 U3.6
s3: J8.2 R15.1 U3.7 | length 11.9
  Bottom Layer w1: J8.2@4.064,46.863 4.318,47.117 12.446,47.117 13.717,45.846 U3.7@13.717,44.186
tro1: P3.5 R27.1 | length 5.1
  Bottom Layer w1: P3.5 64.77,44.331 65.278,44.839 65.278,47.649 65.436,47.807 65.436,48.235 65.461,48.26 R27.1
tro2: P3.6 R23.1 | length 6.1
  Bottom Layer w1: P3.6 67.463,43.968 67.463,45.365 70.135,48.037 70.135,48.362 70.16,48.387 R23.1
tro3: P3.7 R19.1 | length 4.9
  Bottom Layer w1: P3.7 69.85,43.899 70.22,44.268 70.589,44.268 70.836,44.515 71.15,44.515 73.346,46.712 73.346,46.747 R19.1@73.255,46.839
trs1: J12.2 P3.2 | length 2.7
  Bottom Layer w1: P3.2 J12.2
trs2: J12.3 P3.3 | length 2.7
  Bottom Layer w1: P3.3 J12.3
trs3: J12.4 P3.4 | length 2.7
  Bottom Layer w1: P3.4 J12.4
"tx at": J1.4 J2.4 J3.3 J4.3 J5.2 U1.31 U3.21 | length 14.8
  Top Layer w0.5: J4.3@3.556,18.034 J4.3@3.853,18.034 ; J4.3@3.599,18.161 3.789,17.97 4.615,17.145 12.48,17.145 U1.31@14.28,18.945
  Top Layer w1: J2.4 J3.3
vcc: PS1.4 U2.3 | length 6
  Bottom Layer w1: PS1.4 5.454,57.651 8.255,60.452 8.255,62.23 U2.3@8.331,62.306
vesp: C1.1 C2.1 C3.1 J1.5 J2.5 R1.2 R2.2 R3.2 R4.2 R5.2 R6.2 R7.2 R8.2 R9.2 R10.2 R11.2 R12.2 R13.2 R14.1 R15.2 R16.2 R17.2 U1.4 U1.6 U1.18 U2.2 U2.4 U3.3 U3.8 | length 143
  Top Layer w0.5: C2.1@10.916,28.315 11.234,28.315 11.481,28.067 13.208,28.067 U1.18@13.462,27.813 ; U1.18 16.06,25.25 16.06,24.118 ; U1.6 16.06,24.118 ; J2.5 19.396,17.18 19.396,18.49 18.579,19.306 18.579,19.322 18.182,19.719 U1.4 U1.4 16.06,21.856 16.06,24.118
  Top Layer w0.8: 3.225,33.451 1.905,32.131 1.905,16.637 2.667,15.875 R13.2
  Top Layer w1: 3.225,33.451 R12.2 R10.2 R8.2 R6.2 R4.2 16.256,33.451 R2.2 24.765,33.451 27.305,33.451 R7.2 R5.2 34.925,33.451 R1.2 ; R13.2@7.508,15.875 18.499,15.875 19.558,16.934 J2.5
  Bottom Layer w0.7: 1.778,59.863 1.778,54.229 1.778,53.721 1.778,50.292 1.778,47.117 1.778,40.259 2.159,39.878
  Bottom Layer w1: 2.159,39.878 19.558,39.878 19.707,40.027 20.85,40.027 21.59,40.767 21.59,42.418 21.59,43.497 21.654,43.561 U3.3@21.654,43.702 ; U2.4@3.007,60.964 U2.4@3.465,60.964 ; U2.4 U2.2@7.112,64.262 ; U3.8 11.654,43.268 11.684,43.238 11.684,40.005 12.065,40.005
pads on no net: J7.2 J9.2 S2.1 S2.3 U1.19 U1.20 U1.23 U3.4 U3.17
copper on no net: | length 46.8
  Top Layer w0.254: 41.91,14.224 41.91,43.053
  Bottom Layer w0.254: 43.307,15.909 43.307,33.909

## Polygon pours and split planes (outlines as drawn)
faz on Bottom Layer "NONET_L02_P003" (solid, shelved, pour order 3): 1.397,63.5 12.7,63.5 12.7,57.277 11.303,55.88 1.524,55.88 1.524,63.627
no net on Bottom Layer "NONET_L02_P001" (solid, pour order 1): 6.985,67.691

## Keep-outs
Keep-Out Layer:
  lines w1: 0,-0.381 0,85 150,85 150,0 0,0

## Other copper
Top Layer:
  region net NetC4_2: 36.449,23.114 38.672,23.114 38.925,22.86 38.925,18.542 38.417,18.034 38.163,18.288 37.148,18.288 35.687,19.748 35.687,22.352
  region net NetC5_2: 38.925,29.083 38.798,29.21 37.846,29.21 34.544,25.908 34.544,25.146 35.687,24.003 38.672,24.003 38.925,24.257
  region net GND: 33.528,16.002 33.528,15.494 33.655,15.367 39.497,15.367 40.767,16.637 40.767,20.193 40.64,20.193 40.005,19.558 40.005,17.399 38.862,16.256 38.735,16.383 36.068,16.383
  region net vesp: 6.731,16.383 6.604,16.256 2.286,16.256 2.286,15.748 2.667,15.367 21.082,15.367 21.844,16.129 21.844,16.51 19.05,16.51 18.415,15.875 16.891,15.875
Bottom Layer:
  region net nol: 83.693,64.198 84.328,64.834 88.392,64.834 89.027,64.198 89.027,54.165 88.265,53.404 85.217,53.404 83.693,54.927
  region net oo3: 75.565,64.262 76.2,64.897 81.915,64.897 82.55,64.262 82.55,56.134 80.899,54.483 78.994,54.483 78.994,57.277 75.565,60.706
  region net oo2: 67.437,64.262 68.009,64.834 73.152,64.834 73.787,64.198 73.787,57.975 72.644,56.832 72.263,57.213 68.199,57.213 67.437,57.975
  region net oo1: 59.436,64.262 60.071,64.897 65.405,64.897 66.04,64.262 66.04,57.404 63.881,55.245 61.849,55.245 59.436,57.658
  region: 58.166,64.262 57.531,64.897 52.451,64.897 51.816,64.262 51.816,57.023 52.07,56.769 57.531,56.769 58.166,57.404
  region: 38.1,21.971
  region: 38.1,21.971
  region: 38.1,21.971
  region net "tx at": 28.194,45.212 28.194,48.768 28.067,48.895 27.686,48.895 27.051,48.26 27.051,44.958
  region net "rx at": 28.956,45.085 28.956,49.403 29.21,49.657 30.099,49.657 30.353,49.403 30.353,44.958
  region net adc: 30.988,40.767 30.988,38.989 32.639,38.989 32.766,39.116 32.766,43.434 32.131,44.069 31.623,43.561 31.623,42.418 30.988,41.783
  region net "tx at": 27.686,41.212 27.686,39.116 25.781,39.116 25.781,41.148 26.162,41.529
  region net "rx at": 30.353,40.767 30.353,39.116 28.321,39.116 28.321,41.021 28.956,41.656
  region net "rx at": 28.956,45.593 29.18,45.817 30.129,45.817 30.353,45.593 30.353,40.767 29.845,40.259 29.21,40.259 28.956,40.513
  region net "tx at": 26.162,41.529 27.051,42.418 27.051,45.593 27.305,45.847 27.94,45.847 28.194,45.593 28.194,42.545 27.686,42.037 27.686,40.386 27.178,39.878 26.543,39.878 26.162,40.259
  region net GND: 40.259,41.385 40.259,39.624 39.624,38.989 34.544,38.989 34.544,40.513 35.306,41.275
  region net vesp: 1.524,40.259 8.763,40.259 10.287,41.783 21.336,41.783 21.336,39.751 20.701,39.116 2.286,39.116 1.524,39.878
  region: -2.794,58.039
  region net vesp: 3.489,62.925 1.438,60.874 1.438,56.302 4.404,59.268 4.404,62.01
  region net faz: 5.969,72.263 6.985,71.247 6.985,69.977 4.699,69.977
  region net nol: 37.582,76.073 34.798,76.073 34.29,75.565 34.29,75.057 34.925,75.057 36.005,73.977 37.651,75.624
  region net faz: 6.096,76.073 6.436,75.733 6.351,70.486 5.842,69.977 2.159,69.977 1.651,70.485 1.651,75.692 2.032,76.073
  region net "rx at": 25.273,59.118 25.273,61.341 25.844,61.912 26.606,61.912 27.178,61.341 27.178,60.071 25.559,58.452
  region net "tx at": 22.987,59.598 22.987,61.468 23.495,61.976 23.876,61.976 24.638,61.214 24.638,59.817 23.862,59.041
  region net GND: 10.898,54.507 16.51,48.895 20.955,48.895 23.241,51.181 19.589,54.833 16.33,54.833
  region net GND: 39.878,42.672 33.909,42.672 33.528,42.291 33.528,40.132 39.751,40.132 40.259,40.64 40.259,42.418
  region: 40.132,42.926
  region: 40.132,45.593 40.386,45.339 40.386,43.815 40.132,43.561 37.719,43.561 34.417,43.561 33.782,44.196 33.782,45.085 34.29,45.593
  region net oo3: 22.496,76.073 27.94,76.073 28.384,75.629 28.384,72.009 24.638,72.009 22.098,74.549 22.098,75.615
  region net oo2: 14.986,76.073 20.32,76.073 20.701,75.692 20.701,70.231 15.113,70.231 14.605,70.739 14.605,75.692
  region net oo1: 7.62,75.692 8.001,76.073 12.954,76.073 13.335,75.692 13.335,70.993 9.525,70.993 7.62,72.898
  region net nol: 43.561,75.819
  region net nol: 36.703,76.073 40.005,76.073 40.449,75.629 40.45,69.025 35.941,73.533 35.941,75.311
  pour cut-out: 4.318,76.962
  region net GND: 14.224,57.15 28.702,57.15 28.702,56.642 22.415,50.355 18.288,54.483 6.477,54.483 10.223,58.229 10.223,60.96 14.224,60.96
  region: 19.431,59.309
  region: 20.447,59.309
  region: 30.353,59.055

## Silkscreen, mask and mechanical layers (free items; w line width, h text height)
Mechanical 1:
  lines w0.2: 1.143,38.862 1.143,76.2 40.767,76.2 40.767,38.862 1.143,38.862

## Text inside footprints (layer, text, board x,y; h text height)
U3: Mechanical 13 "CUTOUT POLYGON" at 33.02,43.938 h0.25 r270; Mechanical 13 "ANTENNA AREA" at 33.528,43.938 h0.25 r270